# EAGLE board Testing Farm Sensors (EAGLE 9.7.0)

Size 233.9 x 93.23 mm. Coordinates in mm from the lower left corner, seen from the top.
Outline: 0,0 233.9,0 233.9,93.22 0,93.22 0,0
Copper layers (1*16): Top 0.035mm / dielectric 1.5mm / Bottom 0.035mm
Design rules "default": minimum track width 6mil, minimum drill 0.35mm, track to track 6mil, track to pad 6mil, pad to pad 6mil, via to via 6mil, smd to smd 6mil, copper to edge 40mil, drill to drill 6mil, minimum pad ring 10mil, minimum via ring 8mil, stop-mask expansion 4mil, vias tented up to drill 0mil, thermal gap 10mil

## Footprints (pad centres in the part's own frame; a part is rotated, then mirrored left to right if it is on the bottom)
RESAD1016W63L850D250B = drill 0.83 pad 1.43: 1 -5.08,0; 2 5.08,0
HA-06-SM065 = drill 1 pad 1.676: 1 -2.54,-2.54; 2 0,2.54; 3 2.54,-2.54
SEN-13322 = drill 1.016 long: 1 -2.54,0; 2 0,0; 3 2.54,0
ARDUINO-UNO-R3-SHIELD = drill 1.016 pad 1.88: 3.3V 24.13,-2.54; 5V 24.13,0; A0 24.13,12.7; A1 24.13,15.24; A2 24.13,17.78; A3 24.13,20.32; A4 24.13,22.86; A5 24.13,25.4; AREF -24.13,-13.97; D2 -24.13,20.32; D3 -24.13,17.78; D4 -24.13,15.24; D5 -24.13,12.7; D6 -24.13,10.16; D7 -24.13,7.62; D8 -24.13,3.81; D9 -24.13,1.27; D10 -24.13,-1.27; D11 -24.13,-3.81; D12 -24.13,-6.35; D13 -24.13,-8.89; GND@0 24.13,2.54; GND@1 24.13,5.08; GND@2 -24.13,-11.43; IOREF 24.13,-7.62; NC 24.13,-10.16; RES 24.13,-5.08; RX -24.13,25.4; SCL -24.13,-19.05; SDA -24.13,-16.51; TX -24.13,22.86; VIN 24.13,7.62
JHD-162A = drill 1.016 long: 1 -19.05,0; 2 -16.51,0; 3 -13.97,0; 4 -11.43,0; 5 -8.89,0; 6 -6.35,0; 7 -3.81,0; 8 -1.27,0; 9 1.27,0; 10 3.81,0; 11 6.35,0; 12 8.89,0; 13 11.43,0; 14 13.97,0; 15 16.51,0; 16 19.05,0
TO92 = drill 0.813 octagon: 1 -1.27,0; 2 0,1.905; 3 1.27,0

## Placement (x,y rotation side)
R2  220  [RESAD1016W63L850D250B]  147.3,84.26 270 top
RPOTLCD_ADJUST1  250k  [HA-06-SM065]  106.66,58.86 0 top
SEN1  SEN-13322  [SEN-13322]  226.91,84.1 0 top
U3  ARDUINO-UNO-R3-SHIELD  [ARDUINO-UNO-R3-SHIELD]  47.88,42.35 270 top
U4  LCD-16X2JHD-162A  [JHD-162A]  128.58,36.63 0 top
U5  TMP36GT9Z_TO92  [TO92]  160,74.1 0 top

## Library data of the parts
R2 RPOTLCD_ADJUST1 SEN1 U3-U5 = Tinkercad

## Nets
U3_5V: R2.1 RPOTLCD_ADJUST1.1 U3.5V U4.2 U5.3
U3_A0: U3.A0 U5.2
U3_A4: SEN1.1 U3.A4
U3_A5: SEN1.3 U3.A5
U3_D2: U3.D2 U4.14
U3_D3: U3.D3 U4.13
U3_D4: U3.D4 U4.12
U3_D5: U3.D5 U4.11
U3_D11: U3.D11 U4.6
U3_D12: U3.D12 U4.4
U3_GND: RPOTLCD_ADJUST1.3 SEN1.2 U3.GND@0 U3.GND@1 U3.GND@2 U4.1 U4.5 U4.16 U5.1
U4_LED+: R2.2 U4.15
U4_VO: RPOTLCD_ADJUST1.2 U4.3

## Tracks (layer width: path | path; a pad name or v marks a point on that pad's centre or on a via)
U3_5V  (4 unrouted)
U3_A0  (1 unrouted)
U3_A4  (1 unrouted)
U3_A5  (1 unrouted)
U3_D2  (1 unrouted)
U3_D3  (1 unrouted)
U3_D4  (1 unrouted)
U3_D5  (1 unrouted)
U3_D11  (1 unrouted)
U3_D12  (1 unrouted)
U3_GND  (8 unrouted)
U4_LED+  (1 unrouted)
U4_VO  (1 unrouted)